# EAGLE board tpa6120a2_headamp (EAGLE 9.5.1)
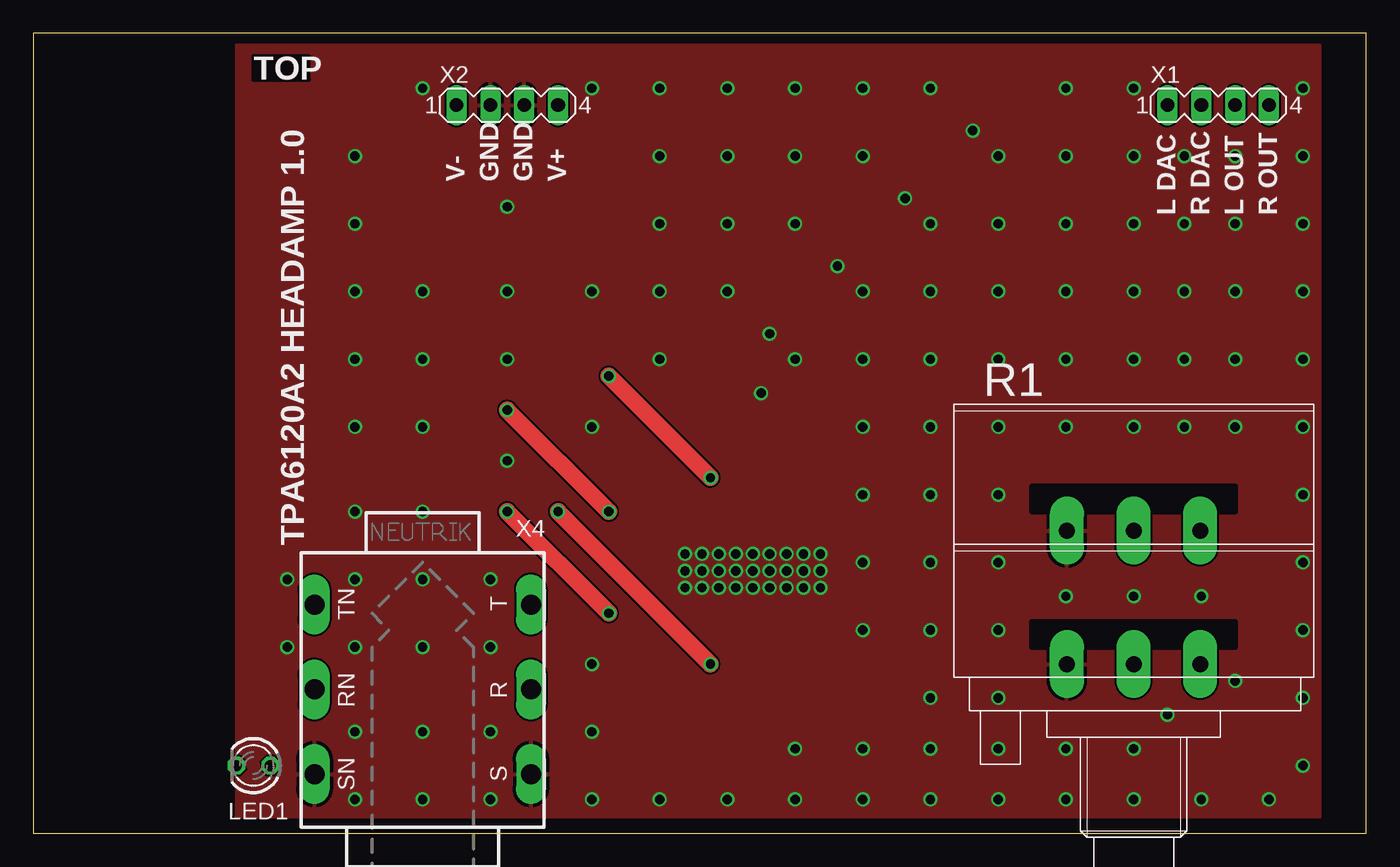
[diagram p0: board, top side]
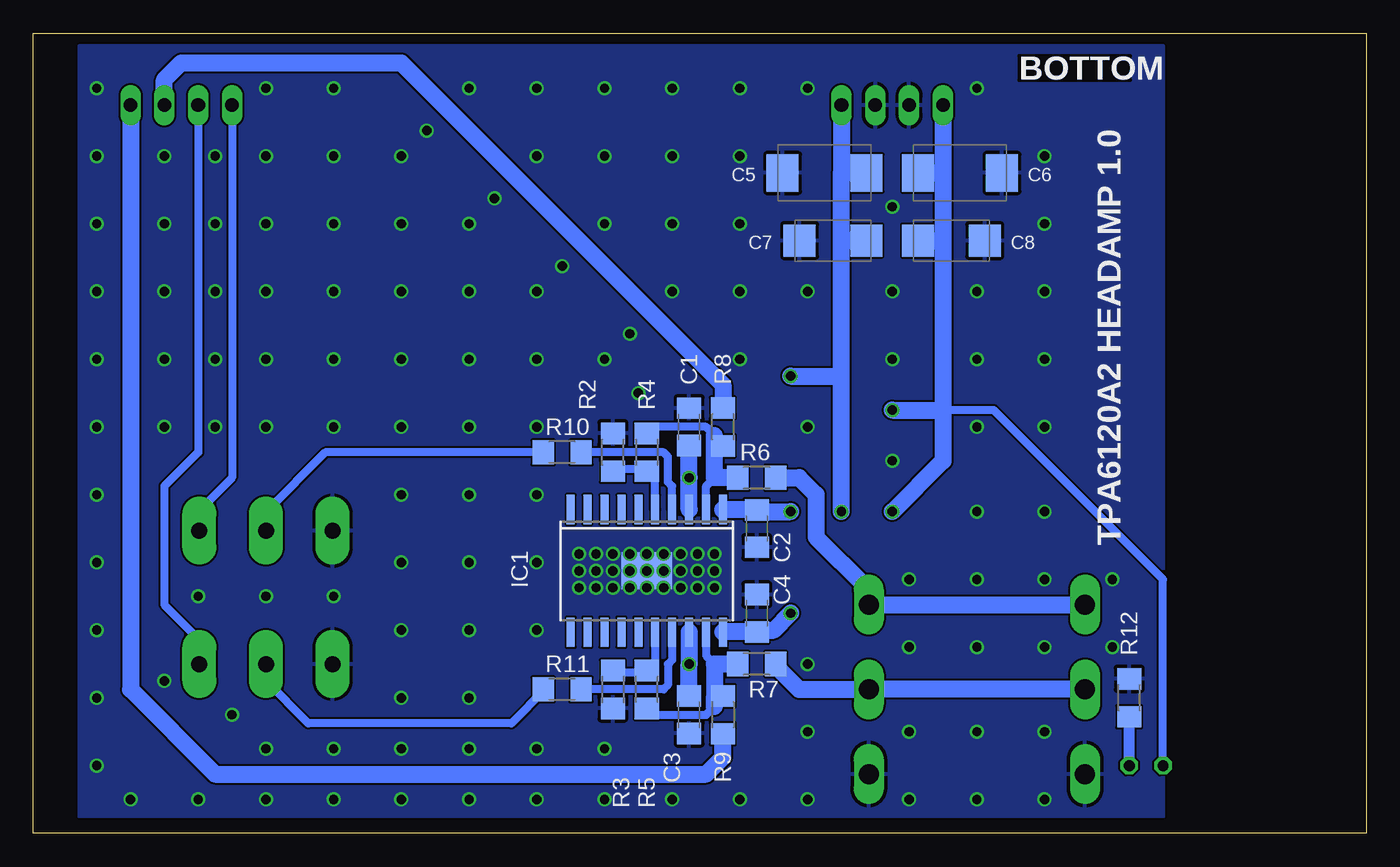
[diagram p1: board, bottom side, seen from below]

Size 100 x 60 mm. Coordinates in mm from the lower left corner, seen from the top.
Outline: 0,0 100,0 100,60 0,60 0,0
Copper layers (1*16): Top 0.035mm / dielectric 1.5mm / Bottom 0.035mm
Design rules "SeeedStudio_2layer_DRU_no_angle_20140221 *": minimum track width 6mil, minimum drill 12mil, track to track 6mil, track to pad 6mil, pad to pad 6mil, via to via 6mil, smd to smd 0mil, copper to edge 10mil, drill to drill 10mil, minimum pad ring 10mil, minimum via ring 6mil, stop-mask expansion 2mil, vias tented up to drill 100mil, thermal gap 10mil
tRestrict: area 74.9,24.1 to 90.2,26; area 74.9,14 to 90.2,15.9

## Footprints (pad centres in the part's own frame; a part is rotated, then mirrored left to right if it is on the bottom)
C1206 = smd 1.6 x 1.8: 1 -1.4,0; 2 1.4,0
SMC_D = smd 2.4 x 2.8: + -3.15,0; - 3.15,0
SMC_C = smd 2.4 x 2.4: + -2.5,0; - 2.5,0
SO20POWERPAD = smd 0.6 x 2.2: 1 -5.715,-4.6; 2 -4.445,-4.6; 3 -3.175,-4.6; 4 -1.905,-4.6; 5 -0.635,-4.6; 6 0.635,-4.6; 7 1.905,-4.6; 8 3.175,-4.6; 9 4.445,-4.6; 10 5.715,-4.6; 11 5.715,4.6; 12 4.445,4.6; 13 3.175,4.6; 14 1.905,4.6; 15 0.635,4.6; 16 -0.635,4.6; 17 -1.905,4.6; 18 -3.175,4.6; 19 -4.445,4.6; 20 -5.715,4.6 | smd 3.81 x 2.79: PAD 0,0
LED3MM = drill 0.813 octagon: A -1.27,0; K 1.27,0
ALPS-RK27-DUAL = drill 1.2 pad 2.54 long: 1-1 0,-5; 1-2 0,0; 1-3 0,5; 2-1 -10,-5; 2-2 -10,0; 2-3 -10,5
R1206 = smd 1.6 x 1.803: 1 -1.422,0; 2 1.422,0
MA04-1 = drill 1.016 long: 1 -3.81,0; 2 -1.27,0; 3 1.27,0; 4 3.81,0
NMJ6HCD2 = drill 1.5 long: R 0,8.115; RN 0,-8.115; S 6.35,8.115; SN 6.35,-8.115; T -6.35,8.115; TN -6.35,-8.115

## Placement (x,y rotation side)
C1  100nF  [C1206]  50.8,30.48 90 bottom
C2  100nF  [C1206]  45.72,22.86 270 bottom
C3  100nF  [C1206]  50.8,8.89 270 bottom
C4  100nF  [C1206]  45.72,16.51 90 bottom
C5  100uF/16V  [SMC_D]  40.64,49.53 180 bottom
C6  100uF/16V  [SMC_D]  30.48,49.53 180 bottom
C7  10uF/16V  [SMC_C]  40.01,44.45 180 bottom
C8  10uF/16V  [SMC_C]  31.11,44.45 180 bottom
IC1  TPA6120  [SO20POWERPAD]  53.98,19.68 180 bottom
LED1  TLLG4400  [LED3MM]  16.51,5.08 180 top
R1  10k/G  [ALPS-RK27-DUAL]  82.55,12.7 270 top
R2  820  [R1206]  56.52,28.57 270 bottom
R3  820  [R1206]  56.52,10.79 90 bottom
R4  820  [R1206]  53.98,28.57 90 bottom
R5  820  [R1206]  53.98,10.79 270 bottom
R6  22  [R1206]  45.72,26.67 0 bottom
R7  22  [R1206]  45.72,12.7 0 bottom
R8  22  [R1206]  48.26,30.48 270 bottom
R9  22  [R1206]  48.26,8.89 90 bottom
R10  50  [R1206]  60.33,28.57 0 bottom
R11  50  [R1206]  60.33,10.79 0 bottom
R12  4k7  [R1206]  17.78,10.16 270 bottom
X1  S1G4  [MA04-1]  88.9,54.61 0 top
X2  S1G4  [MA04-1]  35.56,54.61 0 top
X4  NMJ6HCD2  [NMJ6HCD2]  29.21,10.79 270 top

## Library data of the parts
C1-C8 R2-R12 = rcl
IC1 R1 X4 = pavouk
LED1 = led; MF: VISHAY SEMICONDUCTOR; OC_FARNELL: 1612435
X1 X2 = con-lstb; OC_FARNELL: unknown; OC_NEWARK: unknown

## Nets
+12V: C1.1 C3.1 C5.+ C7.+ IC1.3 IC1.18 X2.4
-12V: C2.1 C4.1 C6.- C8.- IC1.1 IC1.20 LED1.K X2.1
GND: C1.2 C2.2 C3.2 C4.2 C5.- C6.+ C7.- C8.+ IC1.PAD R1.1-1 R1.2-1 R2.1 R3.1 R12.1 X2.2 X2.3 X4.S X4.SN
N$1: IC1.19 R5.2 R7.1 R9.2
N$2: IC1.5 R2.2 R4.1
N$3: IC1.16 R3.2 R5.1
N$4: IC1.2 R4.2 R6.1 R8.2
N$5: R6.2 X4.T X4.TN
N$6: R1.2-3 X1.1
N$7: R1.1-3 X1.2
N$8: R1.2-2 R10.1
N$9: R1.1-2 R11.1
N$10: R7.2 X4.R X4.RN
N$11: IC1.4 R10.2
N$12: IC1.17 R11.2
N$13: LED1.A R12.2
N$17: R8.1 X1.3
N$18: R9.1 X1.4

## Tracks (layer width: path | path; a pad name or v marks a point on that pad's centre or on a via)
+12V  (via drill 0.7)
  Top 1.27: v50.8,26.67 v43.18,34.29 | v50.8,12.7 v39.37,24.13
  Bottom 1.27: C1.1 v50.8,26.67 IC1.3 | IC1.18 v50.8,12.7 C3.1 | v39.37,24.13 39.37,34.29 | 39.37,34.29 39.37,44.45 | 39.37,44.45 39.37,49.53 | v43.18,34.29 39.37,34.29 | X2.4 39.37,49.53 | C5.+ 39.37,49.53 | C7.+ 39.37,44.45
-12V  (via drill 0.7)
  Top 1.27: v43.18,24.13 v35.56,31.75 | v43.18,16.51 v35.56,24.13
  Bottom 0.61: LED1.K 15.24,19.05 27.94,31.75 31.75,31.75
  Bottom 1.27: IC1.20 48.26,15.11 C4.1 45.72,15.24 44.45,15.24 v43.18,16.51 | IC1.1 48.26,24.26 C2.1 45.72,24.13 v43.18,24.13 | v35.56,31.75 31.75,31.75 | v35.56,24.13 31.75,27.94 31.75,31.75 | X2.1 31.75,49.53 | 31.75,49.53 31.75,44.45 | 31.75,44.45 31.75,31.75 | C6.- 31.75,49.53 | C8.- 31.75,44.45
GND  (via drill 0.7)
  other vias: 57.78,18.41 57.78,20.95 56.52,18.41 56.52,20.95 55.24,18.41 55.24,20.95 53.98,20.95 52.7,19.68 52.7,20.95 51.44,19.68 51.44,20.95 50.16,20.95 48.9,20.95 48.9,18.41 50.16,18.41 51.44,18.41 52.7,18.41 53.98,18.41 53.98,19.68 55.24,19.68 56.52,19.68 57.78,19.68 50.16,19.68 48.9,19.68 59.05,20.95 59.05,19.68 59.05,18.41 35.56,40.64 52.07,55.88 24.13,50.8 24.13,45.72 29.21,35.56 29.21,40.64 35.56,35.56 35.56,46.99 29.21,30.48 29.21,55.88 29.21,19.05 34.29,19.05 24.13,19.05 41.91,55.88 46.99,55.88 46.99,50.8 46.99,45.72 41.91,40.64 52.07,40.64 57.15,45.72 55.24,37.47 62.23,50.8 60.33,42.55 67.31,55.88 65.41,47.62 77.47,55.88 82.55,50.8 82.55,55.88 82.55,45.72 82.55,40.64 72.39,30.48 67.31,30.48 62.23,30.48 77.47,30.48 82.55,35.56 82.55,30.48 67.31,25.4 62.23,25.4 62.23,15.24 67.31,10.16 72.39,10.16 67.31,2.54 72.39,2.54 77.47,2.54 82.55,2.54 87.63,2.54 92.71,2.54 86.36,50.8 86.36,45.72 86.36,40.64 86.36,35.56 86.36,30.48 90.17,50.8 90.17,45.72 90.17,40.64 90.17,35.56 90.17,30.48 90.17,11.43 87.63,17.78 82.55,17.78 77.47,17.78 95.25,50.8 95.25,55.88 95.25,45.72 95.25,40.64 95.25,35.56 95.25,30.48 95.25,25.4 95.25,20.32 95.25,15.24 95.25,10.16 95.25,5.08 62.23,2.54 57.15,2.54 52.07,2.54 62.23,6.35 57.15,6.35 67.31,6.35 72.39,6.35 77.47,6.35 82.55,6.35 85.09,8.89 46.99,2.54 41.91,7.62 41.91,12.7 24.13,13.97 29.21,13.97 34.29,13.97 34.29,7.62 29.21,7.62 24.13,7.62 46.99,35.56 72.39,25.4 29.21,24.13 24.13,24.13 52.07,50.8 52.07,45.72 57.15,50.8 77.47,50.8 70.48,52.7 77.47,45.72 77.47,40.64 77.47,35.56 72.39,35.56 67.31,35.56 67.31,40.64 72.39,40.64 72.39,45.72 62.23,35.56 46.99,40.64 24.13,40.64 24.13,35.56 67.31,15.24 67.31,20.32 62.23,20.32 72.39,20.32 72.39,15.24 41.91,2.54 29.21,2.54 34.29,2.54 24.13,2.54 19.05,13.97 19.05,19.05 24.13,30.48 35.56,27.94 41.91,30.48 57.15,55.88 62.23,55.88 72.39,50.8 67.31,45.72 62.23,40.64 57.15,35.56 54.61,33.02
  pour Bottom: 15.24,1.27 96.52,1.27 96.52,59.05 15.24,59.05
  pour Top: 15.24,1.27 96.52,1.27 96.52,59.05 15.24,59.05
N$1
  Bottom 0.61: IC1.19 49.53,13.34 48.9,12.7 | 53.98,9.21 R5.2 53.98,8.89 49.53,8.89 48.9,9.53 | R9.2 48.26,10.16
  Bottom 1.27: 48.9,10.16 48.9,12.7 R7.1 | 48.26,10.16 48.9,10.16 | 48.9,9.53 48.9,10.16
N$2
  Bottom 0.61: IC1.5 53.34,26.67 53.98,26.67 R4.1 53.98,27.3 56.52,27.3 R2.2
N$3
  Bottom 0.61: R3.2 56.52,12.06 53.98,12.06 | IC1.16 53.34,12.7 53.98,12.06 | R5.1 53.98,12.06
N$4
  Bottom 0.61: IC1.2 49.53,26.04 48.9,26.67 | 48.9,29.84 49.53,30.48 53.98,30.48 R4.2 | 48.26,29.21 48.9,29.21
  Bottom 1.27: R8.2 48.26,29.21 | 48.9,29.84 48.9,29.21 48.9,26.67 R6.1
N$5
  Bottom 1.27: R6.2 42.55,26.67 41.27,25.4 41.27,22.23 37.47,18.41 37.47,17.14 X4.T X4.TN
N$6
  Bottom 0.61: X1.1 85.09,26.67 87.63,24.13 87.63,22.78 R1.2-3
N$7
  Bottom 0.61: X1.2 87.63,28.57 90.17,26.04 90.17,17.14 87.63,14.61 87.63,12.78 R1.1-3
N$8
  Bottom 0.61: R10.1 78.11,28.57 82.55,24.13 R1.2-2
N$9
  Bottom 0.61: R11.1 61.59,10.79 64.14,8.26 79.38,8.26 82.55,11.43 R1.1-2
N$10
  Bottom 1.27: X4.RN X4.R 42.55,10.79 44.45,12.7 R7.2
N$11
  Bottom 0.61: IC1.4 52.07,26.04 52.39,26.35 52.39,28.26 52.7,28.57 R10.2
N$12
  Bottom 0.61: IC1.17 52.07,13.02 52.39,12.7 52.39,11.11 52.7,10.79 R11.2
N$13
  Bottom 0.813: LED1.A R12.2
N$17
  Bottom 1.27: X1.3 90.17,56.52 88.9,57.78 72.39,57.78 48.26,33.66 R8.1
N$18
  Bottom 1.27: X1.4 92.71,10.79 86.36,4.45 49.53,4.45 48.26,5.71 R9.1

## Text on the board
Top: TOP
Bottom: BOTTOM
tNames: TOP | V- | GND | GND | V+ | L DAC | R DAC | L OUT | R OUT | TPA6120A2 HEADAMP 1.0
bNames: BOTTOM | TPA6120A2 HEADAMP 1.0